# EAGLE board BatalhaNaval (EAGLE 9.7.0)

Size 522.81 x 240.84 mm. Coordinates in mm from the lower left corner, seen from the top.
Outline: 0,0 522.81,0 522.81,240.84 0,240.84 0,0
Copper layers (1*16): Top 0.035mm / dielectric 1.5mm / Bottom 0.035mm
Design rules "default": minimum track width 6mil, minimum drill 0.35mm, track to track 6mil, track to pad 6mil, pad to pad 6mil, via to via 6mil, smd to smd 6mil, copper to edge 40mil, drill to drill 6mil, minimum pad ring 10mil, minimum via ring 8mil, stop-mask expansion 4mil, vias tented up to drill 0mil, thermal gap 10mil

## Footprints (pad centres in the part's own frame; a part is rotated, then mirrored left to right if it is on the bottom)
LEDRD254W60D565H860B = drill 0.981 pad 1.581: 1 -1.27,0; 2 1.27,0
BATTERY-GENERIC = drill 1.118 pad 3.15 octagon: + 2.54,0; - -2.54,0
RESAD1016W63L850D250B = drill 0.83 pad 1.43: 1 -5.08,0; 2 5.08,0
SWITCH-MOMENTARY-PTH-6.5MM = drill 1.016 pad 1.88: 1 -3.251,2.261; 2 3.251,2.261; 3 -3.251,-2.261; 4 3.251,-2.261
78B04ST = drill 0.8: 1 -3.81,-3.81; 2 -1.27,-3.81; 3 1.27,-3.81; 4 3.81,-3.81; 5 3.81,3.81; 6 1.27,3.81; 7 -1.27,3.81; 8 -3.81,3.81
DIP762W53P254L1969H508Q14B = drill 0.743 pad 1.343: 1 -3.81,7.62; 2 -3.81,5.08; 3 -3.81,2.54; 4 -3.81,0; 5 -3.81,-2.54; 6 -3.81,-5.08; 7 -3.81,-7.62; 8 3.81,-7.62; 9 3.81,-5.08; 10 3.81,-2.54; 11 3.81,0; 12 3.81,2.54; 13 3.81,5.08; 14 3.81,7.62

## Placement (x,y rotation side)
D1  RED  [LEDRD254W60D565H860B]  516.75,134.23 180 top
P1  BATTERYGENERIC  [BATTERY-GENERIC]  8.26,141.78 180 top
R1  350  [RESAD1016W63L850D250B]  512.94,126.61 0 top
S1  SWITCH_MOMENTARY  [SWITCH-MOMENTARY-PTH-6.5MM]  96.29,164.79 270 top
SW1  SPST-478B04ST  [78B04ST]  67.08,164.79 0 top
SW2  SPST-478B04ST  [78B04ST]  79.78,164.79 0 top
U1  74HC04_PDIP  [DIP762W53P254L1969H508Q14B]  198.31,233.18 90 top
U2  74HC11_PDIP  [DIP762W53P254L1969H508Q14B]  218.63,233.18 90 top
U3  74HC11_PDIP  [DIP762W53P254L1969H508Q14B]  238.95,233.18 90 top
U4  74HC11_PDIP  [DIP762W53P254L1969H508Q14B]  259.27,233.18 90 top
U5  74HC32_PDIP  [DIP762W53P254L1969H508Q14B]  282.13,233.18 90 top
U6  74HC04_PDIP  [DIP762W53P254L1969H508Q14B]  194.84,162.61 90 top
U7  74HC11_PDIP  [DIP762W53P254L1969H508Q14B]  235.48,162.61 90 top
U8  74HC21_PDIP  [DIP762W53P254L1969H508Q14B]  215.16,162.61 90 top
U10  74HC11_PDIP  [DIP762W53P254L1969H508Q14B]  255.8,162.61 90 top
U11  74HC11_PDIP  [DIP762W53P254L1969H508Q14B]  276.12,162.61 90 top
U12  74HC11_PDIP  [DIP762W53P254L1969H508Q14B]  296.44,162.61 90 top
U13  74HC32_PDIP  [DIP762W53P254L1969H508Q14B]  316.76,162.61 90 top
U14  74HC04_PDIP  [DIP762W53P254L1969H508Q14B]  196.58,83.06 90 top
U15  74HC21_PDIP  [DIP762W53P254L1969H508Q14B]  216.9,83.06 90 top
U16  74HC11_PDIP  [DIP762W53P254L1969H508Q14B]  237.22,83.06 90 top
U17  74HC11_PDIP  [DIP762W53P254L1969H508Q14B]  257.54,83.06 90 top
U18  74HC11_PDIP  [DIP762W53P254L1969H508Q14B]  277.86,83.06 90 top
U19  74HC11_PDIP  [DIP762W53P254L1969H508Q14B]  298.18,83.06 90 top
U20  74HC32_PDIP  [DIP762W53P254L1969H508Q14B]  318.5,83.06 90 top
U21  74HC04_PDIP  [DIP762W53P254L1969H508Q14B]  197.67,8.41 90 top
U22  74HC21_PDIP  [DIP762W53P254L1969H508Q14B]  217.99,8.41 90 top
U23  74HC11_PDIP  [DIP762W53P254L1969H508Q14B]  238.31,8.41 90 top
U24  74HC11_PDIP  [DIP762W53P254L1969H508Q14B]  258.63,8.41 90 top
U25  74HC11_PDIP  [DIP762W53P254L1969H508Q14B]  278.95,8.41 90 top
U26  74HC11_PDIP  [DIP762W53P254L1969H508Q14B]  299.27,8.41 90 top
U27  74HC32_PDIP  [DIP762W53P254L1969H508Q14B]  319.59,8.41 90 top
U28  74HC86_PDIP  [DIP762W53P254L1969H508Q14B]  418.96,138.04 90 top
U29  74HC04_PDIP  [DIP762W53P254L1969H508Q14B]  449.44,138.04 90 top
U30  74HC21_PDIP  [DIP762W53P254L1969H508Q14B]  487.54,138.04 90 top

## Library data of the parts
D1 = Tinkercad; CATEGORY: Opto-Electronic; SUB-CATEGORY: LED; VALUE: LED_RED
P1 R1 S1 SW1 SW2 U1-U8 U10-U30 = Tinkercad

## Nets
D1_A: D1.1 R1.2
P1+: P1.+ S1.3 S1.4 SW1.5 SW1.6 SW1.7 SW1.8 SW2.5 SW2.6 SW2.7 SW2.8 U1.14 U2.14 U3.14 U4.14 U5.14 U6.14 U7.14 U8.14 U10.14 U11.14 U12.14 U13.14 U14.14 U15.14 U16.14 U17.14 U18.14 U19.14 U20.14 U21.14 U22.14 U23.14 U24.14 U25.14 U26.14 U27.14 U28.14 U29.14 U30.12 U30.13 U30.14
P1-: D1.2 P1.- U1.7 U2.7 U3.7 U4.7 U5.7 U6.7 U7.7 U8.7 U10.7 U11.7 U12.7 U13.7 U14.7 U15.7 U16.7 U17.7 U18.7 U19.7 U20.7 U21.7 U22.7 U23.7 U24.7 U25.7 U26.7 U27.7 U28.7 U29.7 U30.7
U1_1Y: U1.2 U2.11
U1_3Y: U1.6 U3.9
U1_4Y: U1.8 U2.9
U2_3Y: U2.8 U5.13
U3_3Y: U3.8 U5.12
U4_3B: U1.4 U4.10
U4_3Y: U4.8 U5.9
U5_3Y: U5.8 U28.2
U5_4Y: U5.10 U5.11
U6_2A: SW2.2 U1.3 U3.10 U6.3 U8.2 U14.3 U15.2 U19.10 U21.1 U22.12 U26.3
U7_3A: SW2.4 U1.9 U4.9 U6.9 U7.9 U10.5 U11.5 U14.11 U16.9 U21.3 U22.9 U25.5
U7_3B: U6.6 U7.10 U8.4 U10.4
U7_3C: SW2.1 U1.1 U3.11 U6.1 U7.11 U12.11 U14.1 U17.3 U19.11 U21.5 U22.13
U7_3Y: U7.8 U13.2
U8_1A: U6.2 U8.1 U11.3
U8_1D: U6.8 U8.5 U12.9
U8_1Y: U8.6 U13.1
U10_2Y: U10.6 U13.4
U11_2Y: U11.6 U13.5
U12_3B: U6.4 U10.3 U12.10
U12_3Y: U12.8 U13.9
U13_1Y: U13.3 U13.13
U13_2Y: U13.6 U13.12
U13_3Y: U13.8 U28.5
U13_4Y: U13.10 U13.11
U14_1Y: U14.2 U15.1 U18.3
U14_2Y: U14.4 U16.11 U17.4 U18.4
U14_5Y: U14.10 U15.5
U14_6Y: U14.12 U15.4 U17.5
U15_1Y: U15.6 U20.1
U16_3Y: U16.8 U20.2
U17_2Y: U17.6 U20.4
U18_2Y: U18.6 U20.5
U19_3Y: U19.8 U20.9
U20_1Y: U20.3 U20.13
U20_2Y: U20.6 U20.12
U20_3Y: U20.8 U28.9
U20_4Y: U20.10 U20.11
U21_1Y: U21.2 U23.3 U25.3
U21_2Y: U21.4 U23.5 U26.5
U21_3Y: U21.6 U24.3
U21_6Y: U21.12 U22.10 U23.4
U22_2Y: U22.8 U27.1
U23_2Y: U23.6 U27.2
U24_2Y: U24.6 U27.4
U25_2Y: U25.6 U27.5
U26_2B: SW2.3 U1.5 U2.10 U6.5 U11.4 U14.13 U16.10 U18.5 U19.9 U21.13 U24.4 U25.4 U26.4
U26_2Y: U26.6 U27.9
U27_1Y: U27.3 U27.13
U27_2Y: U27.6 U27.12
U27_3Y: U27.8 U28.12
U27_4Y: U27.10 U27.11
U28_1A: SW1.1 U28.1
U28_1Y: U28.3 U29.1
U28_2A: SW1.2 U28.4
U28_2Y: U28.6 U29.3
U28_3B: SW1.3 U28.10
U28_3Y: U28.8 U29.9
U28_4B: SW1.4 U28.13
U28_4Y: U28.11 U29.11
U29_1Y: U29.2 U30.1
U29_2Y: U29.4 U30.2
U29_4Y: U29.8 U30.4
U29_5Y: U29.10 U30.5
U30_1Y: U30.6 U30.9
U30_2B: S1.1 S1.2 U30.10
U30_2Y: R1.1 U30.8

## Tracks (layer width: path | path; a pad name or v marks a point on that pad's centre or on a via)
D1_A  (1 unrouted)
P1+  (41 unrouted)
P1-  (30 unrouted)
U1_1Y  (1 unrouted)
U1_3Y  (1 unrouted)
U1_4Y  (1 unrouted)
U2_3Y  (1 unrouted)
U3_3Y  (1 unrouted)
U4_3B  (1 unrouted)
U4_3Y  (1 unrouted)
U5_3Y  (1 unrouted)
U5_4Y  (1 unrouted)
U6_2A  (10 unrouted)
U7_3A  (11 unrouted)
U7_3B  (3 unrouted)
U7_3C  (10 unrouted)
U7_3Y  (1 unrouted)
U8_1A  (2 unrouted)
U8_1D  (2 unrouted)
U8_1Y  (1 unrouted)
U10_2Y  (1 unrouted)
U11_2Y  (1 unrouted)
U12_3B  (2 unrouted)
U12_3Y  (1 unrouted)
U13_1Y  (1 unrouted)
U13_2Y  (1 unrouted)
U13_3Y  (1 unrouted)
U13_4Y  (1 unrouted)
U14_1Y  (2 unrouted)
U14_2Y  (3 unrouted)
U14_5Y  (1 unrouted)
U14_6Y  (2 unrouted)
U15_1Y  (1 unrouted)
U16_3Y  (1 unrouted)
U17_2Y  (1 unrouted)
U18_2Y  (1 unrouted)
U19_3Y  (1 unrouted)
U20_1Y  (1 unrouted)
U20_2Y  (1 unrouted)
U20_3Y  (1 unrouted)
U20_4Y  (1 unrouted)
U21_1Y  (2 unrouted)
U21_2Y  (2 unrouted)
U21_3Y  (1 unrouted)
U21_6Y  (2 unrouted)
U22_2Y  (1 unrouted)
U23_2Y  (1 unrouted)
U24_2Y  (1 unrouted)
U25_2Y  (1 unrouted)
U26_2B  (12 unrouted)
U26_2Y  (1 unrouted)
U27_1Y  (1 unrouted)
U27_2Y  (1 unrouted)
U27_3Y  (1 unrouted)
U27_4Y  (1 unrouted)
U28_1A  (1 unrouted)
U28_1Y  (1 unrouted)
U28_2A  (1 unrouted)
U28_2Y  (1 unrouted)
U28_3B  (1 unrouted)
U28_3Y  (1 unrouted)
U28_4B  (1 unrouted)
U28_4Y  (1 unrouted)
U29_1Y  (1 unrouted)
U29_2Y  (1 unrouted)
U29_4Y  (1 unrouted)
U29_5Y  (1 unrouted)
U30_1Y  (1 unrouted)
U30_2B  (2 unrouted)
U30_2Y  (1 unrouted)